# Altium PCB PCB1.pcbdoc
Units mm, origin at the board's own origin, x right, y up, seen from the top; angles counter-clockwise.
Board outline 65.7 x 65.7 mm, 2 copper layers (Top Layer, Bottom Layer); 18 components, 12 nets, 81 pads, 20 vias.
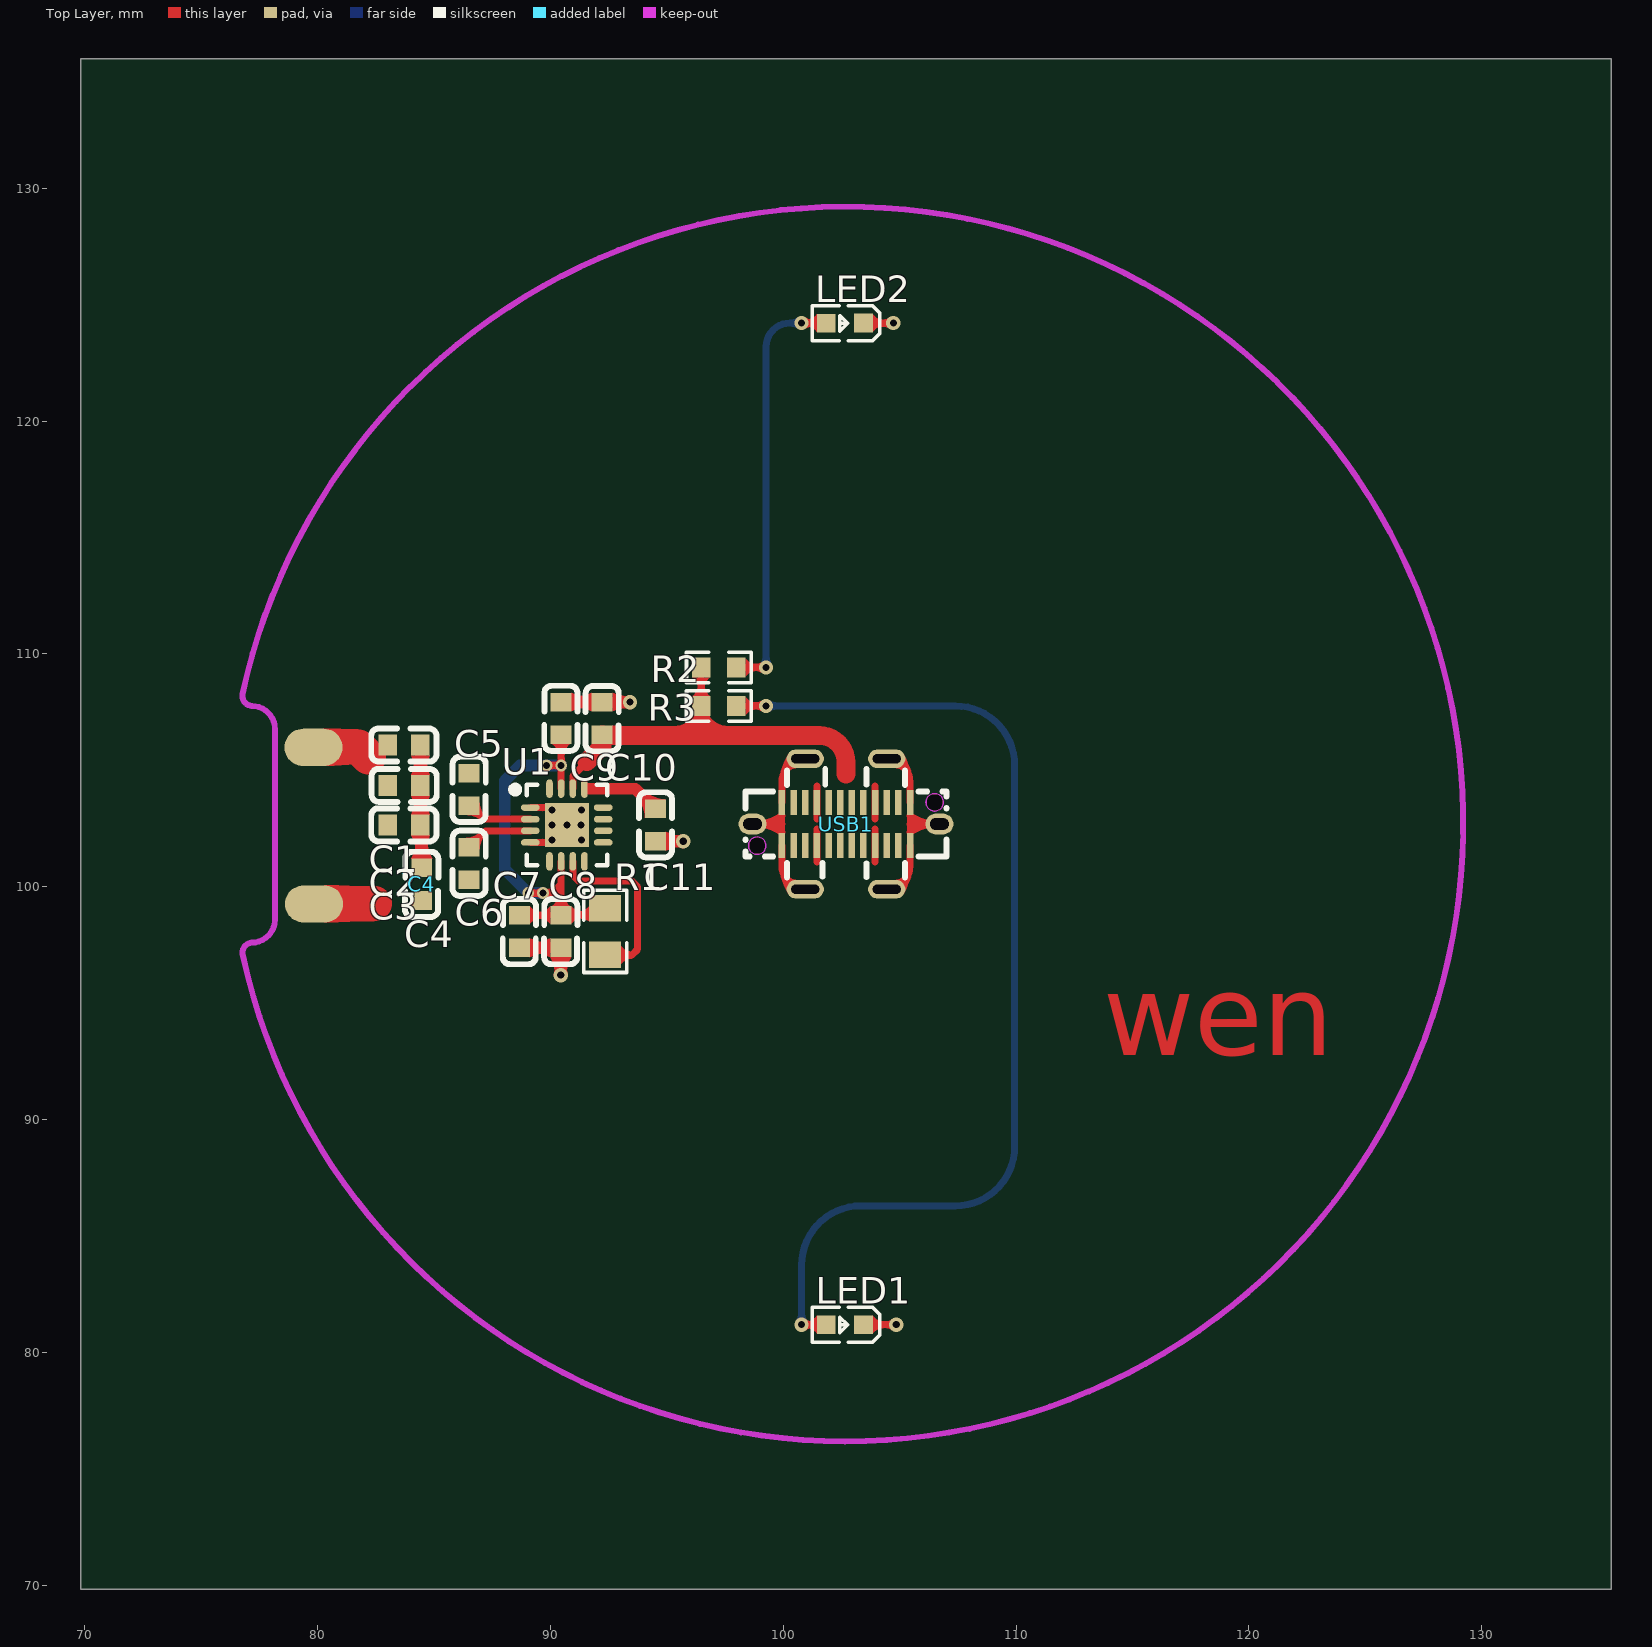
[diagram p0: Top Layer view]
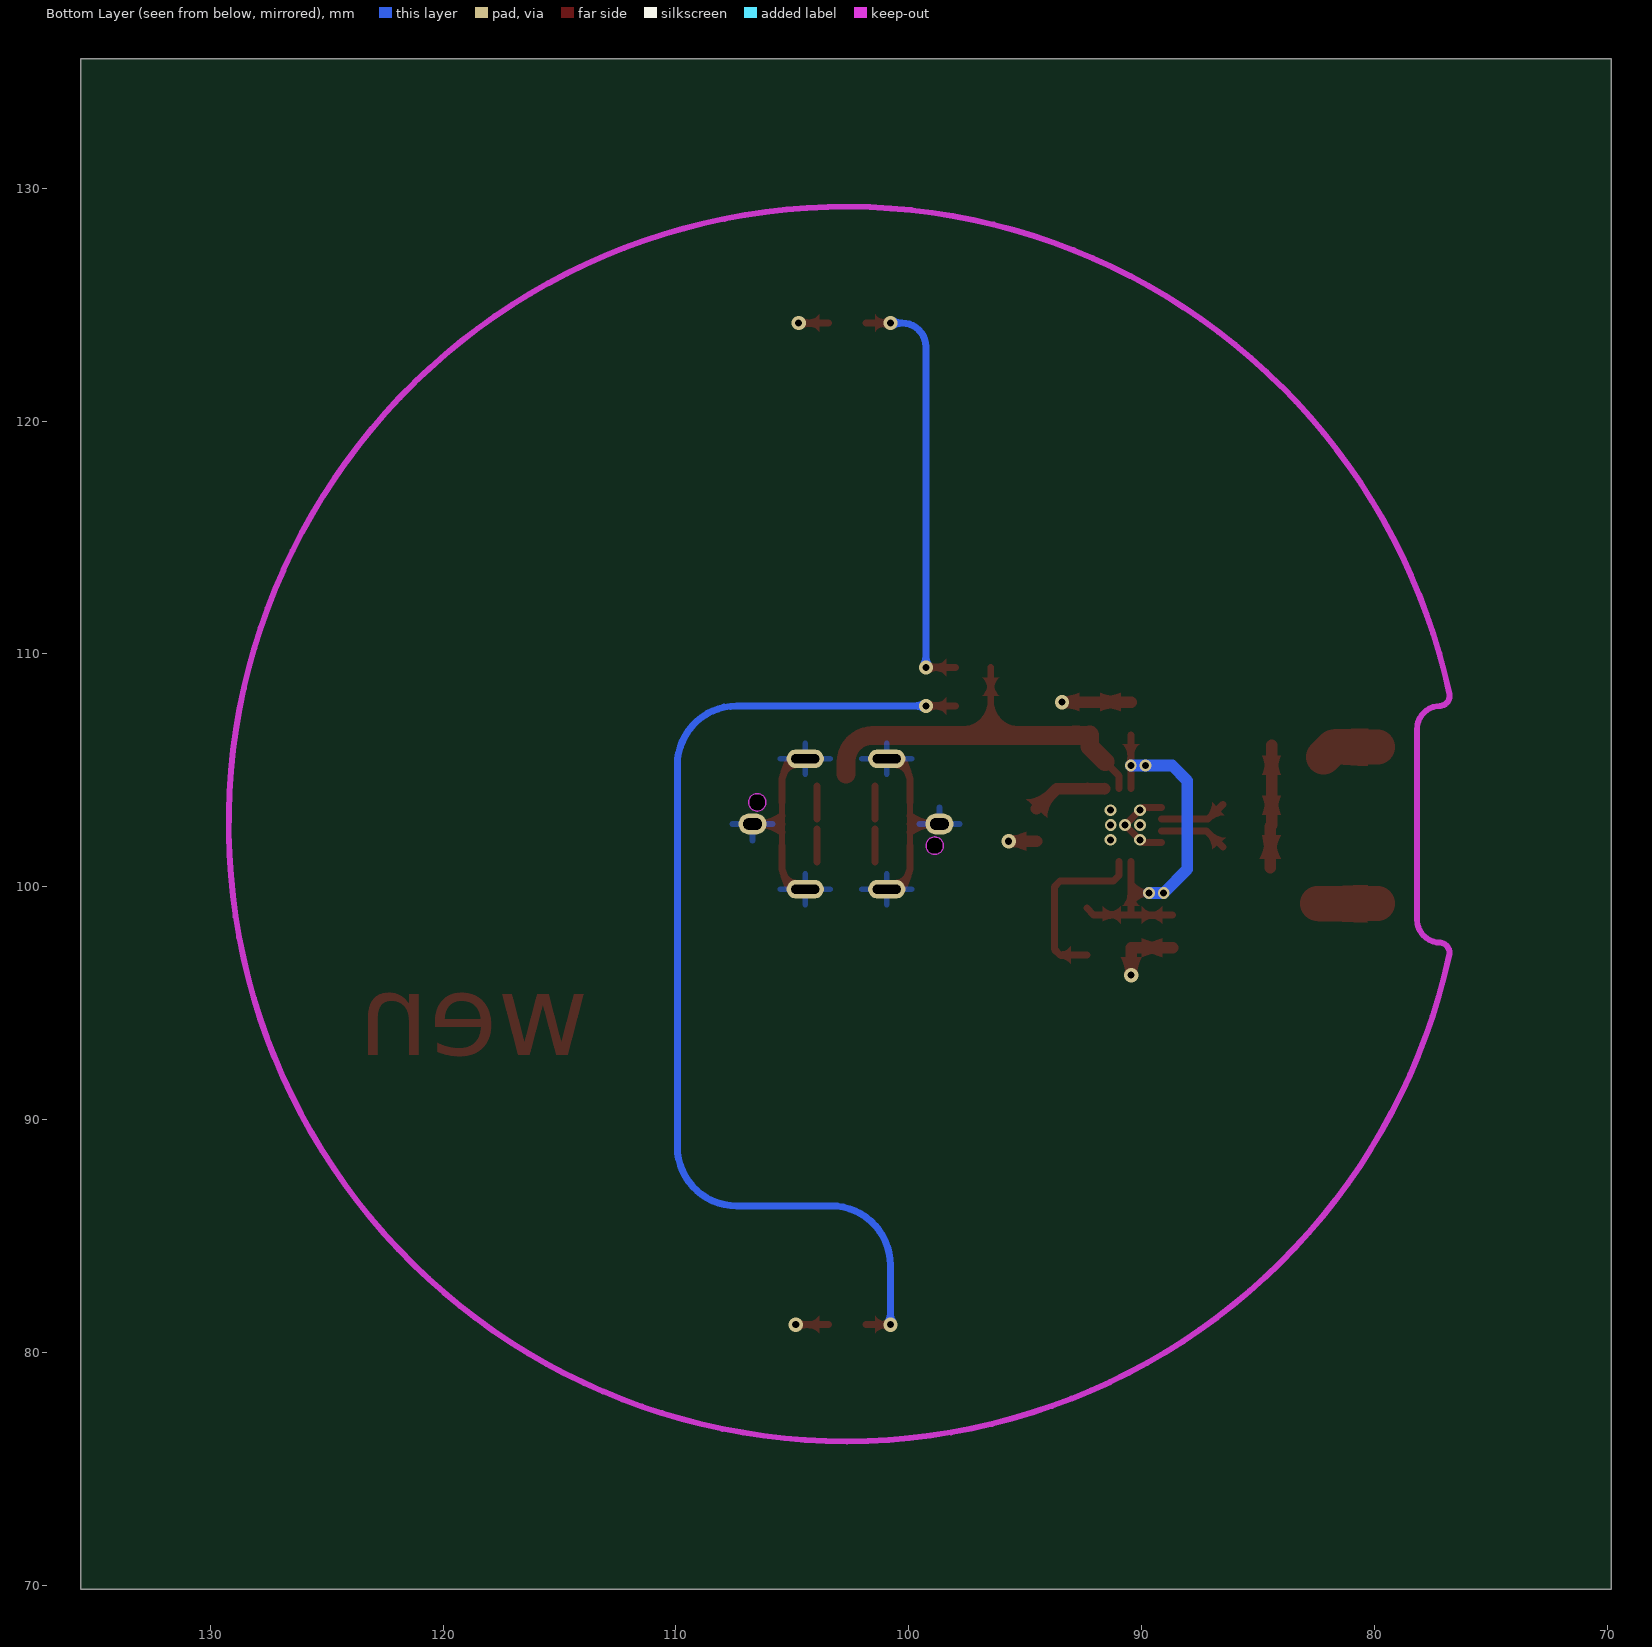
[diagram p1: Bottom Layer view, seen from below]

## Layer stack, top to bottom
Top Layer: signal copper (thickness not stored)
Dielectric: dielectric 0.32, FR-4, Dk 4.8
Bottom Layer: signal copper (thickness not stored)

## Board outline
135.551,69.85 69.85,69.85 69.85,135.552 135.551,135.552

## Design rules (kind name [scope] priority, off if disabled: settings)
BoardOutlineClearance copperThickness1oz [All] p0: genericclearance=0.254 ignorepadtopadclearanceinfootprint=FALSE except(0: Arc-SplitContinuation Track-SplitContinuation SMDPad-SplitContinuation THPad-SplitContinuation Via-SplitContinuation Fill-SplitContinuation Poly-SplitContinuation Region-SplitContinuation Text-SplitContinuation; 0.152: Track-CutoutEdge SMDPad-CutoutEdge THPad-CutoutEdge Via-CutoutEdge Region-CutoutEdge; 0.3: Track-OutlineEdge SMDPad-OutlineEdge THPad-OutlineEdge Via-OutlineEdge Fill-OutlineEdge Region-OutlineEdge Poly-OutlineEdge Text-OutlineEdge Fill-CutoutEdge)
BoardOutlineClearance copperThickness2oz [All] p0: genericclearance=0.254 ignorepadtopadclearanceinfootprint=FALSE except(0: Arc-SplitContinuation Track-SplitContinuation SMDPad-SplitContinuation THPad-SplitContinuation Via-SplitContinuation Fill-SplitContinuation Poly-SplitContinuation Region-SplitContinuation Text-SplitContinuation; 0.152: Track-CutoutEdge SMDPad-CutoutEdge THPad-CutoutEdge Via-CutoutEdge Region-CutoutEdge; 0.3: Track-OutlineEdge SMDPad-OutlineEdge THPad-OutlineEdge Via-OutlineEdge Fill-OutlineEdge Region-OutlineEdge Poly-OutlineEdge Text-OutlineEdge Fill-CutoutEdge)
Clearance copperThickness1oz [(InNet('VRECT') OR InNet('GND') OR InNet('VOUT') OR InNet('$1N731') OR InNet('$1N738') OR InNet('$1N739') OR InNet('$1N740') OR InNet('$1N741') OR InNet('$1N729') OR InNet('$1N735') OR InNet('$1N3305') OR InNet('$1N3301'))] p1: gap=0.178 ignorepadtopadclearanceinfootprint=FALSE except(0.102: Track-Track; 0.152: Track-SMDPad SMDPad-SMDPad Track-THPad SMDPad-THPad THPad-THPad Track-Via SMDPad-Via THPad-Via Via-Via SMDPad-Fill THPad-Fill Via-Fill Fill-Fill Track-Region SMDPad-Region THPad-Region Via-Region Region-Region Track-Poly SMDPad-Poly THPad-Poly Via-Poly Fill-Poly Region-Poly Poly-Poly Track-Text SMDPad-Text THPad-Text Via-Text Fill-Text Region-Text Poly-Text Text-Text; 0.175: Track-Hole SMDPad-Hole THPad-Hole Via-Hole Fill-Hole Region-Hole Poly-Hole Text-Hole Sheet-Hole; 0.3: Track-Fill Fill-Region Track-Sheet SMDPad-Sheet THPad-Sheet Via-Sheet Fill-Sheet Region-Sheet Poly-Sheet Text-Sheet)
Clearance copperThickness2oz [All] p1: gap=0.178 ignorepadtopadclearanceinfootprint=FALSE except(0.152: Track-SMDPad SMDPad-SMDPad Track-THPad SMDPad-THPad THPad-THPad Track-Via SMDPad-Via THPad-Via Via-Via SMDPad-Fill THPad-Fill Via-Fill Fill-Fill Track-Region SMDPad-Region THPad-Region Via-Region Region-Region Track-Poly SMDPad-Poly THPad-Poly Via-Poly Fill-Poly Region-Poly Poly-Poly Track-Text SMDPad-Text THPad-Text Via-Text Fill-Text Region-Text Poly-Text Text-Text; 0.175: Track-Hole SMDPad-Hole THPad-Hole Via-Hole Fill-Hole Region-Hole Poly-Hole Text-Hole Sheet-Hole; 0.203: Track-Track; 0.3: Track-Fill Fill-Region Track-Sheet SMDPad-Sheet THPad-Sheet Via-Sheet Fill-Sheet Region-Sheet Poly-Sheet Text-Sheet)
DiffPairsRouting differentialPair [All] p1: maxuncoupledlength=10 minlimit=6 maxlimit=6 mostfreqgap=6 toplayer_minwidth=5 toplayer_prefwidth=10 toplayer_maxwidth=100 bottomlayer_minwidth=5 bottomlayer_prefwidth=10 bottomlayer_maxwidth=100
PasteMaskExpansion pasteMaskExpansion [All] p1: expansion=0
PlaneConnect innerPlane [All] p1: planeconnectstyle=Relief reliefexpansion=0.508 reliefentries=4 reliefconductorwidth=0.254 reliefairgap=0.254
PolygonConnect copperRegion [All] p1: connectstyle=Relief reliefentries=4 reliefconductorwidth=10 polygonreliefangle="90 Angle" airgapwidth=10
PolygonConnect 直连 [All] p1: connectstyle=Direct reliefentries=4 reliefconductorwidth=10 polygonreliefangle="90 Angle" airgapwidth=10
RoutingVias viaSize [All] p1: viastyle="Through Hole" holewidth=12.0078 minholewidth=11.811 maxholewidth=248.0314 width=24.0158 minwidth=19.685 maxwidth=393.7008
SolderMaskExpansion solderMaskExpansion [All] p1: useseparateexpansions=TRUE expansion=2 expansionbottom=2
Width copperThickness1oz [All] p1: maxlimit=100 minlimit=5 preferedwidth=10
Width copperThickness2oz [All] p1: maxlimit=100 minlimit=8 preferedwidth=10

## Components (designator, comment, footprint, x,y, rotation, side; value= is the part's Value field where it differs from the comment)
C1 "0603B104K500NT" C0603 83.726,106.088 r0 top
C2 "0603B473K500NT" C0603 83.726,104.361 r180 top
C3 "CL10B333KB8NNNC" C0603 83.726,102.659 r0 top
C4 "0603B222K500NT" C0603 84.488,100.119 r90 top
C5 "0603B473K500NT" C0603 86.52,104.183 r270 top
C6 "0603B473K500NT" C0603 86.52,101.008 r270 top
C7 "CL10A106MA8NRNC" C0603 88.679,98.087 r90 top
C8 "0603B104K500NT" C0603 90.457,98.087 r90 top
C9 "CL10A106MA8NRNC" C0603 90.457,107.231 r270 top
C10 "CL10A106MA8NRNC" C0603 92.235,107.231 r90 top
C11 "CL10A105KB8NNNC" C0603 94.521,102.659 r270 top
LED1 "MHT192DUGCT" LED0603-RD 102.65,81.206 r180 top
LED2 "MHT192DUGCT" LED0603-RD 102.65,124.206 r180 top
R1 "0805W8J0221T5E" R0805 92.362,98.087 r270 top
R2 "0603WAF1002T5E" R0603 97.24,109.42 r0 top
R3 "0603WAF1002T5E" R0603 97.24,107.769 r0 top
U1 "NU1680" QFN-16_L3.0-W3.0-P0.50-TL-EP1.9 90.711,102.659 r0 top
USB1 "TYPEC-953-ACP24" USB-C-SMD_TYPEC-953-ACP24 102.7,102.701 r180 top

## Footprints (in the part's own frame and the unit in brackets; to place one, negate y for a bottom-side part, rotate by r counter-clockwise, add the part's x,y. Pads: shape width x height; smd on the part's side, far side on the other; paste and mask are expansions set on the pad)
C0603 [mm]
  rect 0.8x0.9 smd: 1(-0.7,0) 2(0.7,0)
  silkscreen extent -1.41,-0.71 1.39,0.72
LED0603-RD [mm]
  rect 0.8x0.8 smd: 1(-0.799,0) 2(0.799,0)
  silkscreen extent -1.49,-0.75 1.39,0.76
QFN-16_L3.0-W3.0-P0.50-TL-EP1.9 [mm]
  oval 0.8x0.28 smd: 1(-1.565,0.749) 2(-1.565,0.249) 3(-1.565,-0.251) 4(-1.565,-0.751) 9(1.565,-0.751) 10(1.565,-0.251) 11(1.565,0.249) 12(1.565,0.749)
  oval 0.28x0.8 smd: 5(-0.739,-1.562) 6(-0.239,-1.562) 7(0.261,-1.562) 8(0.761,-1.562) 13(0.761,1.562) 14(0.261,1.562) 15(-0.239,1.562) 16(-0.739,1.562)
  rect 1.9x1.9 smd: 17(0.011,-0.001)
  silkscreen extent -2.36,-1.73 1.74,1.72
R0603 [mm]
  rect 0.806x0.864 smd: 1(-0.753,0) 2(0.753,0)
  silkscreen extent -1.39,-0.66 1.39,0.66
R0805 [mm]
  rect 1.133x1.377 smd: 1(-1,0) 2(1,0)
  silkscreen extent -1.76,-0.92 1.76,0.92
USB-C-SMD_TYPEC-953-ACP24 [mm]
  oval 1.2x0.9 hole 0.5 slot 0.8 at 0 deg: 1(-4.01,0) 1(4.01,0)
  oval 1.6x0.8 hole 0.4 slot 1.2 at 0 deg: 2(-1.75,2.8) 2(-1.75,-2.8) 2(1.75,2.8) 2(1.75,-2.8)
  rect 0.28x1.06 smd: A1(2.75,0.925) A2(2.25,0.925) A3(1.75,0.925) A4(1.25,0.925) A5(0.75,0.925) A6(0.25,0.925) A7(-0.25,0.925) A8(-0.75,0.925) A9(-1.25,0.925) A10(-1.75,0.925) A11(-2.25,0.925) A12(-2.75,0.925) B1(-2.75,-0.925) B2(-2.25,-0.925) B3(-1.75,-0.925) B4(-1.25,-0.925) B5(-0.75,-0.925) B6(-0.25,-0.925) B7(0.25,-0.925) B8(0.75,-0.925) B9(1.25,-0.925) B10(1.75,-0.925) B11(2.25,-0.925) B12(2.75,-0.925)
  Board Outline Layer circle w0.005: c3.81,0.93 r0.375
  Board Outline Layer circle w0.005: c-3.81,-0.93 r0.375
  Board Outline Layer region: 3.435,0.93 3.472,1.093 3.576,1.223 3.726,1.296 3.893,1.296 4.044,1.223 4.148,1.093 4.185,0.93 4.185,0.93 4.148,0.767 4.044,0.637 3.893,0.564 3.726,0.564 3.576,0.637 3.472,0.767 3.435,0.93
  Board Outline Layer region: -4.185,-0.93 -4.148,-0.767 -4.044,-0.637 -3.894,-0.564 -3.727,-0.564 -3.576,-0.637 -3.472,-0.767 -3.435,-0.93 -3.435,-0.93 -3.472,-1.093 -3.576,-1.223 -3.727,-1.296 -3.894,-1.296 -4.044,-1.223 -4.148,-1.093 -4.185,-0.93
  Multi-Layer board cut-out: 3.435,0.93 3.472,1.093 3.576,1.223 3.726,1.296 3.893,1.296 4.044,1.223 4.148,1.093 4.185,0.93 4.185,0.93 4.148,0.767 4.044,0.637 3.893,0.564 3.726,0.564 3.576,0.637 3.472,0.767 3.435,0.93
  Multi-Layer board cut-out: -4.185,-0.93 -4.148,-0.767 -4.044,-0.637 -3.894,-0.564 -3.727,-0.564 -3.576,-0.637 -3.472,-0.767 -3.435,-0.93 -3.435,-0.93 -3.472,-1.093 -3.576,-1.223 -3.727,-1.296 -3.894,-1.296 -4.044,-1.223 -4.148,-1.093 -4.185,-0.93
  silkscreen extent -4.32,-2.37 4.32,2.3

## Free pads (board coordinates)
  oval 2.5x1.6 smd: 1(79.841,105.991) 2(79.863,99.267)

## Via types
v1: diameter 0.5, hole 0.3, Top Layer to Bottom Layer, 11 vias
v2: diameter 0.61, hole 0.305, Top Layer to Bottom Layer, 9 vias

## Nets (pads, with @x,y where several pads share a name; then routed paths per layer and width w, separated by ;. In a path a pad name is that pad's centre, name@x,y a point inside that pad or via, vN(x,y) a via of type N, cw(c..) or ccw(c..) an arc to the next point about the centre after c; other vN are vias at no path point)
$1N729: C11.1 U1.13 | length 3.3
  Top Layer w0.5: U1.13@91.598,104.221 93.659,104.221 C11.1
$1N731: C1.2 C2.1 C3.2 C4.2 C5.1 U1.16 | length 5.3
  Top Layer w0.5: C1.2 C2.1 C3.2 84.488,102.597 C4.2
$1N735: R1.2 U1.7 | length 7.8
  Top Layer w0.3: U1.7 90.972,100.492 91.219,100.246 93.505,100.246 93.759,99.992 93.759,97.325 93.505,97.071 92.378,97.071 R1.2
$1N738: C1.1 C2.2 C3.1 pad.1 | length 2.5
  Top Layer w1.5: pad.1@79.881,106.012 81.77,106.012 82.202,105.58
$1N739: C4.1 C6.2 pad.2 U1.5 | length 2.6
  Top Layer w1.5: pad.2@79.881,99.281 82.456,99.281
$1N740: C5.2 U1.2 | length 2.9
  Top Layer w0.3: C5.2@86.52,103.548 87.16,102.907 U1.2
$1N741: C6.1 U1.3 | length 2.9
  Top Layer w0.3: C6.1 87.22,102.408 U1.3
$1N3301: LED2.2 R2.2 | length 18.2
  Top Layer w0.3: R2.2 v2@99.311,109.42 ; v2(100.796,124.206) LED2.2
  Bottom Layer w0.3: v2(99.272,109.42) 99.272,123.19 cw(c100.288,123.19) 100.288,124.206 v2(100.796,124.206)
$1N3305: LED1.2 R3.2 | length 45.4
  Top Layer w0.3: R3.2 v2(99.272,107.769) ; v2(100.796,81.206) LED1.2
  Bottom Layer w0.3: v2(99.272,107.769) 107.4,107.769 cw(c107.4,105.229) 109.94,105.229 109.94,88.846 cw(c107.4,88.846) 107.4,86.306 103.336,86.306 ccw(c103.336,83.766) 100.796,83.766 v2(100.796,81.206)
GND: C7.1 C8.1 C9.1 C10.2 C11.2 LED1.1 LED2.1 U1.1 U1.4 U1.17 USB1.1 USB1.2 USB1.A1 USB1.A12 USB1.B1 USB1.B12 | length 29.6
  Top Layer w0.254: USB1.A1 99.95,102.696 USB1.B12 ; USB1.A12 105.45,102.679 USB1.B1
  Top Layer w0.3: U1.4 89.972,101.908 v1(90.722,102.658) 90.712,102.658 v1(90.076,103.294) 89.962,103.408 U1.1 ; USB1.1@98.69,102.701 99.945,102.701 cw(c99.945,102.696) 99.95,102.696 ; USB1.A1 99.95,100.901 ccw(c100.95,100.901) USB1.2@100.95,99.901 ; USB1.B12 99.95,104.501 cw(c100.95,104.501) USB1.2@100.95,105.501 ; LED1.1 v2(104.86,81.206) ; LED2.1 v2(104.733,124.206) ; USB1.2@104.45,99.901 ccw(c104.45,100.901) 105.45,100.901 USB1.A12 ; USB1.2@104.45,105.501 cw(c104.45,104.501) 105.45,104.501 USB1.B1 ; 105.45,102.679 cw(c105.472,102.679) 105.472,102.701 USB1.1@106.71,102.701
  Top Layer w0.5: C7.1 C8.1 v2(90.457,96.212) ; C9.1 C10.2 v2(93.43,107.931) ; C11.2 v2(95.716,101.959)
  other v1: 90.076,102.024 91.346,102.024 90.076,102.659 91.335,102.659 91.346,103.294
VOUT: C10.1 R2.1 R3.1 U1.14 USB1.A4 USB1.A9 USB1.B4 USB1.B9 | length 23.1
  Top Layer w0.3: U1.14 90.972,104.771 91.4,105.199 91.6,105.199 ; 96.467,106.499 96.486,106.518 R3.1 R2.1 ; 101.45,101.062 USB1.A4 ; USB1.A4 101.45,102.49 ; 101.45,102.912 USB1.B9 101.45,104.34 ; 103.95,102.912 USB1.B4 ; 103.95,101.062 USB1.A9 ; USB1.A9 103.95,102.49 ; USB1.B4 103.95,104.34
  Top Layer w0.8: 91.578,105.37 92.234,106.026 92.234,106.521 ccw(c92.256,106.521) 92.256,106.499 96.467,106.499 101.558,106.499 cw(c101.558,105.356) 102.701,105.356 102.701,104.848
VRECT: C7.2 C8.2 C9.2 R1.1 U1.6 U1.15 | length 19
  Top Layer w0.3: C7.2 C8.2 C8.2@90.472,98.802 ; v1(89.06,99.738) v1(89.695,99.738) 90.472,99.738 ; v1(89.843,105.214) v1(90.472,105.214) ; C9.2 90.472,106.515 v1(90.472,105.214) ; U1.6 90.472,99.738 ; U1.15 v1(90.472,105.214) ; R1.1 92.078,98.802 C8.2@90.472,98.802 ; C8.2@90.472,98.802 90.472,99.738
  Bottom Layer w0.5: v1(89.695,99.738) v1(89.06,99.738) 88.044,100.754 88.044,104.564 88.694,105.214 v1(89.843,105.214) v1(90.472,105.214)
pads on no net: U1.8 U1.9 U1.10 U1.11 U1.12 USB1.A2 USB1.A3 USB1.A5 USB1.A6 USB1.A7 USB1.A8 USB1.A10 USB1.A11 USB1.B2 USB1.B3 USB1.B5 USB1.B6 USB1.B7 USB1.B8 USB1.B10 USB1.B11

## Polygon pours and split planes (outlines as drawn)
GND on Bottom Layer (solid, remove dead copper, pour order 10): 125.7,102.701 ccw(c102.7,102.658) 79.7,102.701 ccw(c102.7,102.744)
$1N738 on Top Layer (solid, remove dead copper, pour order 2): 81.821,106.596 83.431,106.596 83.431,102.082 81.821,102.082
VOUT on Top Layer (solid, remove dead copper, pour order 8): 101.177,104.848 104.225,104.848 104.225,100.53 101.177,100.53
$1N739 on Top Layer (solid, remove dead copper, pour order 0): 81.82,100.03 81.821,98.53 86.796,98.53 88.555,100.289 89.649,100.285 90.163,100.833 90.163,101.524 87.847,101.503 87.307,100.982 86.011,100.942 85.152,99.987
$1N731 on Top Layer (solid, remove dead copper, pour order 4): 83.94,106.849 83.941,102.112 83.943,102.112 85.323,102.112 85.492,102.282 85.492,104.051 85.633,104.192 87.495,104.192 87.956,103.791 89.495,103.793 89.732,103.788 90.107,103.788 90.163,103.844 90.163,104.584 90.097,104.65 89.495,104.65 89.317,104.827 88.361,104.823 87.829,105.285 85.645,105.285 85.493,105.437 85.493,106.488 84.982,106.999 84.1,106.997
VOUT on Top Layer (solid, remove dead copper, pour order 6): 90.752,103.809 91.211,103.809 91.219,103.816 91.219,104.66 91.361,104.802 91.567,104.802 92.011,105.246 91.68,105.506 91.366,105.722 90.764,105.081

## Keep-outs
Board Outline Layer:
  lines w0.254: 76.793,108.277 cw(c102.7,102.701) 76.81,97.044 cw(c77.23,97.172) 77.19,97.609 ccw(c77.19,98.609) 78.19,98.609 78.19,106.769 ccw(c77.19,106.769) 77.19,107.769 cw(c77.227,108.207) 76.793,108.277

## Other copper
Top Layer:
  region net $1N738: 81.77,106.762 81.77,105.262 81.539,105.259 81.349,105.253 81.041,105.233 80.732,105.21 80.542,105.199 80.311,105.191 80.27,106.791 80.497,106.794 80.69,106.793 81.02,106.783 81.35,106.769 81.543,106.764
  region net $1N739: 82.456,100.031 82.456,98.531 82.143,98.529 81.871,98.523 81.392,98.505 80.913,98.484 80.327,98.467 80.299,100.066 80.647,100.07 80.928,100.069 81.377,100.056 81.827,100.039 82.108,100.033
  region net $1N731: 84.176,103.859 84.676,103.859 ccw(c86.626,103.859) 84.826,103.109 84.026,103.109 ccw(c82.226,103.859)
  region net $1N731: 84.738,101.459 84.238,101.459 ccw(c82.805,101.459) 84.026,102.209 84.826,102.209 ccw(c87.977,101.459)
  region net $1N731: 84.676,104.888 84.176,104.888 ccw(c82.226,104.888) 84.026,105.638 84.826,105.638 ccw(c86.626,104.888)
  region net $1N731: 84.176,105.561 84.676,105.561 ccw(c86.626,105.561) 84.826,104.811 84.026,104.811 ccw(c82.226,105.561)
  region net $1N731: 84.676,103.161 84.176,103.161 ccw(c82.226,103.161) 84.026,103.911 84.826,103.911 ccw(c86.626,103.161)
  region net $1N731: 84.238,101.969 84.738,101.969 ccw(c86.244,101.969) 84.938,101.219 84.038,101.219 ccw(c82.732,101.969)
  region net $1N740: 87.129,103.151 86.932,102.924 ccw(c86.455,102.287) 86.455,103.083 86.97,103.628 ccw(c87.766,103.628)
  region net $1N741: 86.867,102.267 87.129,102.105 ccw(c87.766,101.627) 86.97,101.627 86.39,102.108 ccw(c86.39,102.903)
  region net VRECT: 89.579,98.937 89.579,98.637 ccw(c89.579,98.074) 89.129,98.412 89.129,99.162 ccw(c89.579,99.499)
  region net GND: 89.879,97.637 89.879,97.137 ccw(c89.879,95.187) 89.129,96.987 89.129,97.787 ccw(c89.879,99.587)
  region net $1N729: 92.362,104.471 92.362,103.971 92.292,103.975 92.223,103.986 92.154,104.002 92.087,104.022 91.847,104.107 91.796,104.121 91.751,104.129 91.711,104.129 91.677,104.121 91.65,104.101 91.629,104.069 91.617,104.023 91.612,103.961 91.612,104.481 91.617,104.419 91.629,104.373 91.65,104.341 91.677,104.321 91.711,104.312 91.751,104.313 91.796,104.321 91.847,104.335 92.087,104.42 92.154,104.44 92.223,104.456 92.292,104.467
  region net VRECT: 89.557,98.637 89.557,98.937 ccw(c89.557,99.499) 90.007,99.162 90.007,98.412 ccw(c89.557,98.074)
  region net VRECT: 91.357,98.952 91.357,98.652 ccw(c91.357,98.09) 90.907,98.427 90.907,99.177 ccw(c91.357,99.515)
  region net VRECT: 90.322,99.637 90.622,99.637 ccw(c91.185,99.637) 90.847,99.187 90.097,99.187 ccw(c89.76,99.637)
  region net GND: 89.257,97.137 89.257,97.637 ccw(c89.257,99.587) 90.007,97.787 90.007,96.987 ccw(c89.257,95.187)
  region net VRECT: 90.622,105.681 90.322,105.681 ccw(c89.76,105.681) 90.097,106.131 90.847,106.131 ccw(c91.185,105.681)
  region net GND: 91.657,108.181 91.657,107.681 ccw(c91.657,105.731) 90.907,107.531 90.907,108.331 ccw(c91.657,110.131)
  region net GND: 91.035,107.681 91.035,108.181 ccw(c91.035,110.131) 91.785,108.331 91.785,107.531 ccw(c91.035,105.731)
  region net $1N735: 93.501,97.221 93.501,96.921 ccw(c93.501,96.358) 93.051,96.696 93.051,97.446 ccw(c93.501,97.783)
  region net VRECT: 91.224,98.652 91.224,98.952 ccw(c91.224,99.515) 91.674,99.177 91.674,98.52 ccw(c91.224,97.817)
  region net $1N729: 93.789,103.737 94.193,104.041 ccw(c94.971,104.974) 94.971,103.759 94.071,102.959 ccw(c92.856,102.959)
  region net GND: 99.823,102.687 100.077,102.687 ccw(c105.665,102.687) 100.09,102.306 99.81,102.306 ccw(c94.236,102.687)
  region net GND: 105.323,102.679 105.577,102.679 ccw(c110.936,102.679) 105.59,102.306 105.31,102.306 ccw(c99.964,102.679)
  region net GND: 105.577,102.715 105.323,102.715 ccw(c99.736,102.715) 105.31,103.096 105.59,103.096 ccw(c111.165,102.715)
  region net GND: 100.077,102.715 99.823,102.715 ccw(c94.236,102.715) 99.81,103.096 100.09,103.096 ccw(c105.665,102.715)
  region net GND: 105.273,100.689 105.506,100.445 105.431,100.263 105.362,100.083 105.29,99.904 105.21,99.725 104.85,100.301 104.887,100.303 104.924,100.31 104.959,100.32 104.994,100.334 105.059,100.372 105.118,100.422 105.17,100.481 105.214,100.546 105.249,100.617
  region net GND: 99.895,100.445 100.127,100.689 100.151,100.617 100.186,100.546 100.23,100.481 100.282,100.422 100.341,100.372 100.407,100.334 100.441,100.32 100.477,100.31 100.513,100.303 100.55,100.301 100.191,99.725 100.11,99.904 100.038,100.083 99.969,100.263
  region net GND: 100.127,104.713 99.895,104.957 99.969,105.139 100.038,105.319 100.11,105.497 100.191,105.676 100.55,105.101 100.513,105.099 100.477,105.092 100.441,105.082 100.407,105.067 100.341,105.029 100.282,104.979 100.23,104.921 100.186,104.855 100.151,104.785
  region net GND: 105.506,104.957 105.273,104.713 105.249,104.785 105.214,104.855 105.17,104.921 105.118,104.979 105.059,105.029 104.994,105.067 104.959,105.082 104.924,105.092 104.887,105.099 104.85,105.101 105.21,105.676 105.29,105.497 105.362,105.319 105.431,105.139
  region net VRECT: 89.4,99.888 89.4,99.588 89.352,99.588 89.307,99.585 89.264,99.575 89.245,99.564 89.225,99.55 89.225,99.925 89.245,99.911 89.264,99.901 89.307,99.89 89.352,99.887
  region net VRECT: 90.035,99.888 90.035,99.588 89.987,99.588 89.942,99.585 89.899,99.575 89.88,99.564 89.86,99.55 89.86,99.925 89.88,99.911 89.899,99.901 89.942,99.89 89.987,99.887
  region net VRECT: 89.355,99.588 89.355,99.888 89.403,99.887 89.448,99.89 89.491,99.901 89.511,99.911 89.53,99.925 89.53,99.55 89.511,99.564 89.491,99.575 89.448,99.585 89.403,99.588
  region net VRECT: 90.183,105.364 90.183,105.064 90.135,105.064 90.089,105.062 90.047,105.051 90.027,105.041 90.008,105.027 90.008,105.402 90.027,105.387 90.047,105.377 90.089,105.366 90.135,105.364
  region net GND: 89.842,101.758 89.661,102.057 89.72,102.052 89.771,102.046 89.792,102.048 89.811,102.055 89.825,102.07 89.836,102.094 90.017,101.781 89.993,101.784 89.971,101.784 89.93,101.775 89.889,101.763
  region net GND: 89.662,103.258 89.839,103.558 89.885,103.552 89.928,103.541 89.97,103.533 89.991,103.532 90.014,103.536 89.837,103.221 89.826,103.245 89.811,103.26 89.793,103.267 89.771,103.269 89.72,103.263
  region net VRECT: 90.322,105.554 90.622,105.554 90.622,105.506 90.625,105.461 90.636,105.418 90.646,105.398 90.66,105.379 90.285,105.379 90.299,105.398 90.309,105.418 90.32,105.461 90.323,105.506
  region net VRECT: 90.132,105.064 90.132,105.364 90.18,105.364 90.226,105.366 90.268,105.377 90.288,105.387 90.307,105.402 90.307,105.027 90.288,105.041 90.268,105.051 90.226,105.062 90.18,105.064
  region net VRECT: 89.695,99.588 cw(c89.695,98.782) 90.322,99.288 90.472,99.738 90.322,100.188 cw(c89.695,100.694) 89.695,99.888
  region net GND: 106.477,102.551 ccw(c106.477,101.051) 105.577,102.251 105.45,102.679 105.577,103.151 ccw(c106.477,104.351) 106.477,102.851
  region net GND: 98.923,102.551 cw(c98.923,101.051) 99.823,102.251 99.95,102.696 99.823,103.151 cw(c98.923,104.351) 98.923,102.851
  region net GND: 93.43,108.181 93.43,107.681 ccw(c93.43,105.758) 92.685,107.531 92.685,108.331 ccw(c93.43,110.103)
  region net GND: 95.716,102.209 95.716,101.709 ccw(c95.716,99.786) 94.971,101.559 94.971,102.359 ccw(c95.716,104.131)
  region net GND: 90.707,96.237 90.207,96.237 ccw(c88.701,96.237) 90.007,96.987 90.907,96.987 ccw(c92.213,96.237)
  region net GND: 90.207,96.578 90.707,96.578 90.709,96.511 90.716,96.447 90.735,96.336 90.754,96.254 90.762,96.212 90.152,96.212 90.161,96.254 90.18,96.336 90.199,96.447 90.205,96.511
  region net GND: 95.35,101.709 95.35,102.209 95.417,102.211 95.48,102.217 95.592,102.236 95.673,102.255 95.716,102.264 95.716,101.654 95.673,101.662 95.592,101.681 95.48,101.7 95.417,101.706
  region net GND: 93.064,107.681 93.064,108.181 93.131,108.183 93.194,108.189 93.306,108.208 93.387,108.227 93.43,108.236 93.43,107.626 93.387,107.634 93.306,107.653 93.194,107.672 93.131,107.678
  region net VOUT: 104.077,102.435 ccw(c104.726,102.435) 104.09,102.306 103.81,102.306
  region net VOUT: 96.636,108.538 96.336,108.538 ccw(c95.774,108.538) 96.111,108.988 96.861,108.988 ccw(c97.199,108.538)
  region net VOUT: 96.336,108.651 96.636,108.651 ccw(c97.199,108.651) 96.861,108.201 96.111,108.201 ccw(c95.774,108.651)
  region net VOUT: 96.636,106.887 96.336,106.887 ccw(c95.774,106.887) 96.111,107.337 96.861,107.337 ccw(c97.199,106.887)
  region net VOUT: 96.336,107.769 cw(c95.286,107.968) 95.286,106.899 96.467,106.499 97.686,106.899 cw(c97.686,107.968) 96.636,107.769
  region net VOUT: 93.885,106.899 93.885,106.099 ccw(c92.685,83.338) 92.685,106.131 92.685,106.931 ccw(c93.885,129.693) 93.885,106.899
  region net GND: 104.3,124.356 104.3,124.056 ccw(c104.3,123.494) 103.85,123.831 103.85,124.581 ccw(c104.3,124.919)
  region net GND: 104.3,81.356 104.3,81.056 ccw(c104.3,80.494) 103.85,80.831 103.85,81.581 ccw(c104.3,81.919)
  region net GND: 104.444,81.056 104.444,81.356 104.497,81.363 104.557,81.38 104.614,81.406 104.658,81.435 104.658,80.978 104.614,81.007 104.557,81.032 104.497,81.05
  region net GND: 104.317,124.056 104.317,124.356 104.37,124.363 104.43,124.38 104.487,124.406 104.531,124.435 104.531,123.978 104.487,124.007 104.43,124.032 104.37,124.05
  region net $1N3305: 98.846,107.919 98.846,107.619 ccw(c98.846,107.057) 98.396,107.394 98.396,108.144 ccw(c98.846,108.482)
  region net $1N3305: 98.856,107.619 98.856,107.919 98.909,107.926 98.969,107.943 99.026,107.968 99.07,107.998 99.07,107.54 99.026,107.57 98.969,107.595 98.909,107.613
  region net $1N3301: 98.846,109.57 98.846,109.27 ccw(c98.846,108.708) 98.396,109.045 98.396,109.795 ccw(c98.846,110.133)
  region net $1N3301: 98.856,109.27 98.856,109.57 98.909,109.577 98.969,109.594 99.026,109.619 99.07,109.649 99.07,109.191 99.026,109.221 98.969,109.246 98.909,109.264
  region net $1N3301: 101.001,124.056 101.001,124.356 ccw(c101.001,124.919) 101.451,124.581 101.451,123.831 ccw(c101.001,123.494)
  region net $1N3305: 101.001,81.056 101.001,81.356 ccw(c101.001,81.919) 101.451,81.581 101.451,80.831 ccw(c101.001,80.494)
  region net $1N3305: 101.211,81.356 101.211,81.056 101.158,81.05 101.098,81.032 101.042,81.007 100.997,80.977 100.997,81.435 101.042,81.405 101.098,81.38 101.158,81.363
  region net $1N3301: 101.211,124.356 101.211,124.056 101.158,124.05 101.098,124.032 101.042,124.007 100.997,123.977 100.997,124.435 101.042,124.405 101.098,124.38 101.158,124.363
  text "wen" at 113.75,92.783 h3.5
Bottom Layer:
  region net $1N3305: 99.687,107.919 99.687,107.619 99.634,107.613 99.574,107.595 99.518,107.57 99.473,107.54 99.473,107.998 99.518,107.968 99.574,107.943 99.634,107.926
  region net $1N3305: 100.646,81.621 100.946,81.621 100.952,81.568 100.97,81.509 100.995,81.452 101.024,81.408 100.567,81.408 100.596,81.452 100.622,81.509 100.639,81.568
  region net $1N3301: 99.122,109.835 99.422,109.835 99.428,109.782 99.446,109.723 99.471,109.666 99.5,109.622 99.043,109.622 99.072,109.666 99.098,109.723 99.115,109.782
  region net $1N3301: 100.38,124.056 100.38,124.356 100.433,124.363 100.493,124.38 100.55,124.405 100.594,124.435 100.594,123.977 100.55,124.007 100.493,124.032 100.433,124.05

## Silkscreen, mask and mechanical layers (free items; w line width, h text height)
Top Silkscreen Layer:
  text "C4" at 83.737,97.419 h1.14
Mech6:
  circle w0.254: c102.7,102.701 r26.5
  circle w0.3: c103.585,102.701 r25
  lines w0.3: 81.2,96.701 ccw(c91.2,96.701) 91.2,86.701 114.2,86.701 ccw(c114.2,96.701) 124.2,96.701 124.2,108.701 ccw(c114.2,108.701) 114.2,118.701 91.2,118.701 ccw(c91.2,108.701) 81.2,108.701 81.2,96.701